# Altium PCB FAFMACMU_ControlPanel-V3-031115.PcbDoc (part 1 of 3)
Units mm, origin at the board's own origin, x right, y up, seen from the top; angles counter-clockwise.
Board outline 264 x 75.64 mm, 2 copper layers (Top Layer, Bottom Layer), stack 1.66 mm thick; 185 components, 162 nets, 766 pads, 792 vias.
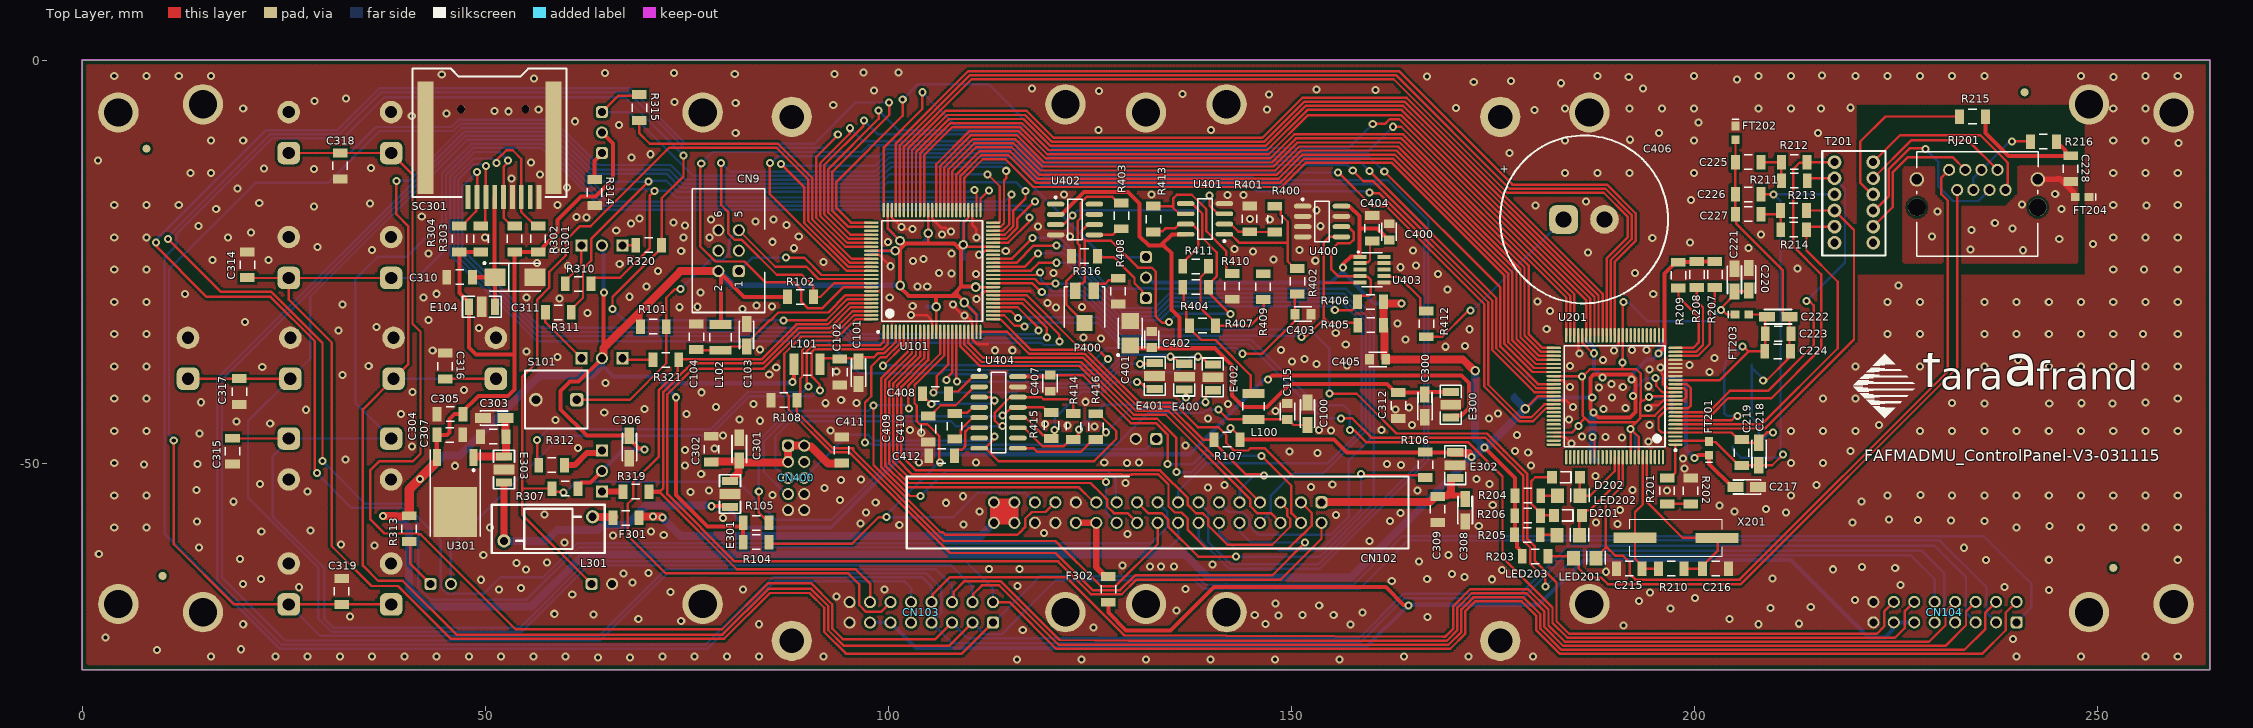
[diagram p0: Top Layer view]
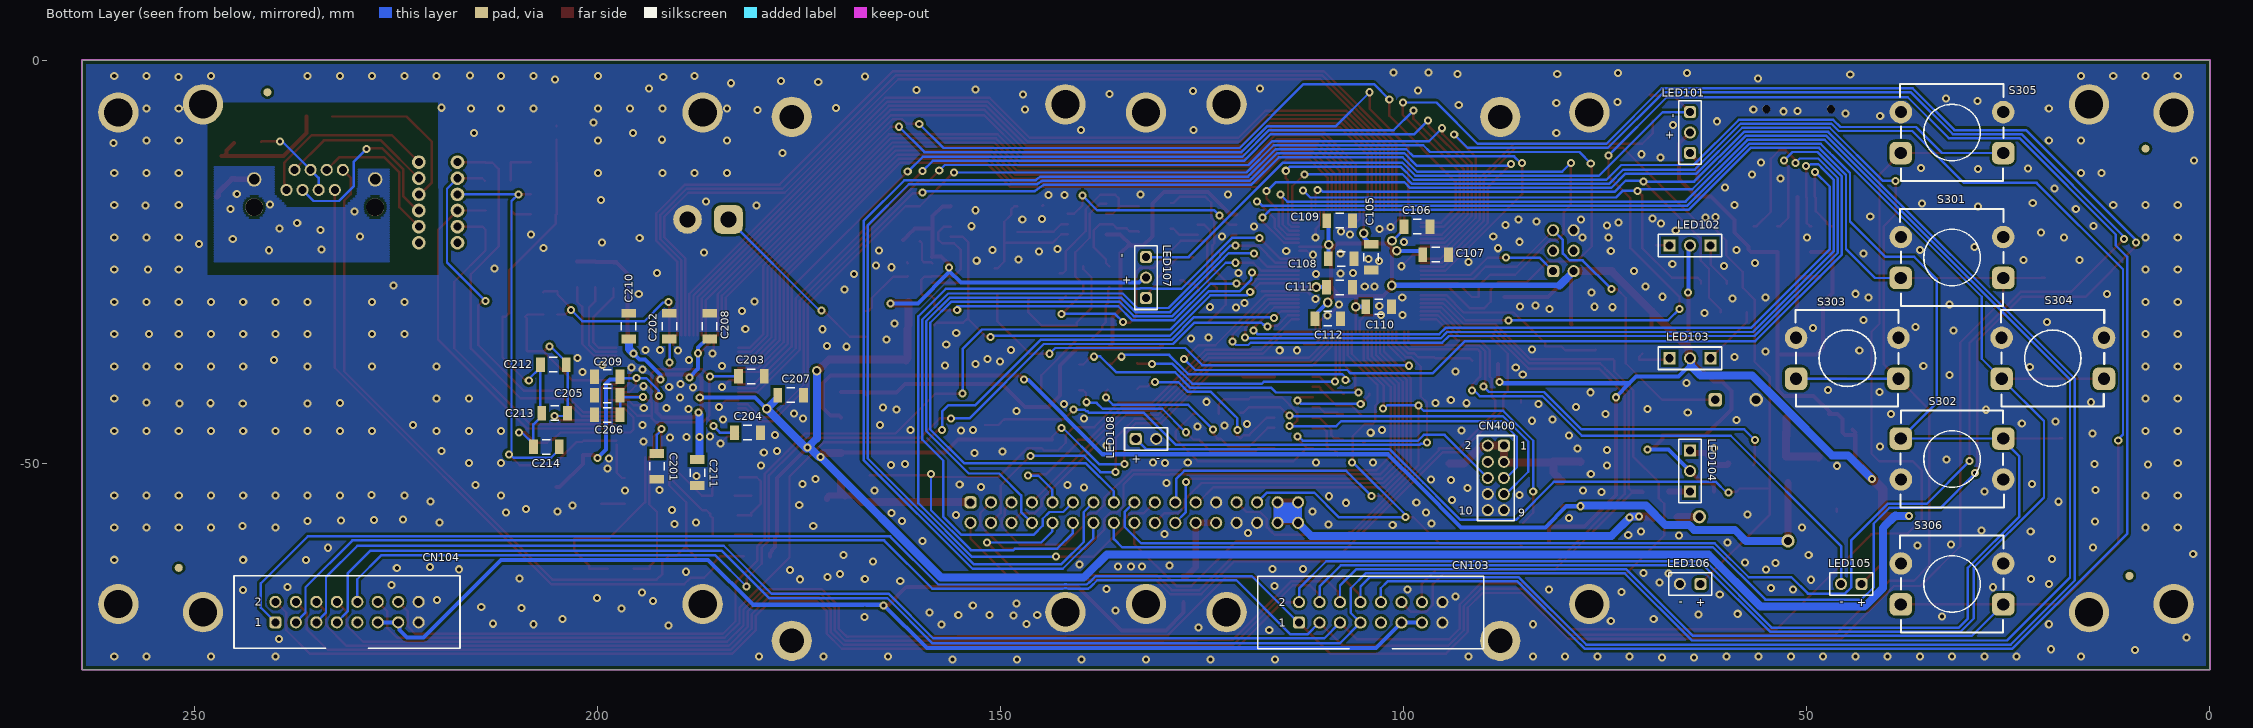
[diagram p1: Bottom Layer view, seen from below]

## Layer stack, top to bottom
Top Solder: solder mask 0.0102, Solder Resist, Dk 3.5
Top Layer: signal copper 0.03
Dielectric1: core 1.6, FR-4, Dk 4.8
Bottom Layer: signal copper 0.03
Bottom Solder: solder mask 0.0102, Solder Resist, Dk 3.5

## Board outline
0,-75.64 0,0 264,0 264,-75.64

## Design rules (kind name [scope] priority, off if disabled: settings)
Clearance Clearance_KeepOut [(OnLayer('Keep-Out Layer'))] p1: gap=0.4 ignorepadtopadclearanceinfootprint=FALSE except(0: Arc-Hole Track-Hole SMDPad-Hole THPad-Hole Via-Hole Fill-Hole Poly-Hole Region-Hole Text-Hole)
Clearance Clearance_100T1_N [(HasFootprint('100T1_N'))] p2: gap=0.2 ignorepadtopadclearanceinfootprint=FALSE except(0: Arc-Hole Track-Hole SMDPad-Hole THPad-Hole Via-Hole Fill-Hole Poly-Hole Region-Hole Text-Hole)
Clearance Clearance_Components [(InComponentClass('All Components'))] p3: gap=0.3 ignorepadtopadclearanceinfootprint=FALSE except(0: Arc-Hole Track-Hole SMDPad-Hole THPad-Hole Via-Hole Fill-Hole Poly-Hole Region-Hole Text-Hole)
Clearance Clearance_Poly [(InPolygon)] p4: gap=0.3 ignorepadtopadclearanceinfootprint=FALSE except(0: Arc-Hole Track-Hole SMDPad-Hole THPad-Hole Via-Hole Fill-Hole Poly-Hole Region-Hole Text-Hole)
Clearance [All] p5: gap=0.3 ignorepadtopadclearanceinfootprint=FALSE except(0: Arc-Hole Track-Hole SMDPad-Hole THPad-Hole Via-Hole Fill-Hole Poly-Hole Region-Hole Text-Hole; 0.2: Arc-Arc Arc-Track Track-Track)
FabricationTestPointUsage TestPointUsage [All] p1: valid=0 allowmultiple=FALSE
FabricationTestpoint Testpoint [(IsPad And (OnTopLayer Or OnBottomLayer))] p1: side=3 testpointundercomponent=TRUE minsize=1.016 maxsize=2.54 preferedsize=1.524 minholesize=0 maxholesize=1.016 preferedholesize=0.813 testpointgrid=0.025 allowsidetop=TRUE allowsidebottom=TRUE usegrid=TRUE gridtolerance=0
HoleSize [All] p1: absolutevalues=TRUE maxlimit=9 minlimit=0.5 maxpercent=80.000 minpercent=20.000
HoleToHoleClearance [All] p1: gap=0.3 allowstackedmicrovias=TRUE
MinimumAnnularRing [All] p1: minimumring=0.25
MinimumSolderMaskSliver [All] p1: minsoldermaskwidth=0.2
PlaneConnect [All] p1: planeconnectstyle=Direct reliefexpansion=0.508 reliefentries=4 reliefconductorwidth=0.254 reliefairgap=0.254
PolygonConnect [All] p1: connectstyle=Direct reliefconductorwidth=0.254 reliefentries=4 polygonreliefangle="90 Angle" airgapwidth=0.254
RoutingVias [All] p1: holewidth=0.5 width=1 viastyle="Through Hole" minholewidth=0.5 minwidth=1 maxholewidth=5 maxwidth=10
SilkToSilkClearance [All] p1: silktosilkclearance=0.2
SilkToSolderMaskClearance SilkscreenOverComponentPads [IsPad] p1: minsilkscreentomaskgap=0.1 clearancetoexposedcopper=TRUE
SolderMaskExpansion [All] p1: expansion=0.1 istentingtop=FALSE
UnConnectedPin [All] p1:
ViasUnderSMD [All] p1: allowed=FALSE
Width [All] p1: maxlimit=5 minlimit=0.3 preferedwidth=0.5
22 further rules are at their usual default settings.

## Classes and differential pairs
component class "Peripherals 2": C400 C401 C402 C403 C404 C405 C406 C407 C408 C409 C410 C411 C412 CN400 E400 E401 E402 P400 R400 R401 R402 R403 R404 R405 R406 R407 R408 R409 R410 R411 R412 R413 R414 R415 R416 U400 U401 U402 U403 U404
component class "Ethernet & LCD": C201 C202 C203 C204 C205 C206 C207 C208 C209 C210 C211 C212 C213 C214 C215 C216 C217 C218 C219 C220 C221 C222 C223 C224 C225 C226 C227 C228 D201 D202 FT201 FT202 FT203 FT204 LED201 LED202 LED203 R201 R202 R203 R204 R205 R206 R207 R208 R209 R210 R211 R212 R213 R214 R215 R216 RJ201 T201 U201 X201
component class Peripherals: C300 C301 C302 C303 C304 C305 C306 C307 C308 C309 C310 C311 C312 C314 C315 C316 C317 C318 C319 CN102 CN103 CN104 E104 E300 E301 E302 E303 F301 F302 L301 LED101 LED102 LED103 LED104 LED105 LED106 LED107 LED108 R301 R302 R303 R304 R307 R310 R311 R312 R313 R314 R315 R316 R319 R320 R321 S301 S302 S303 S304 S305 S306 SC301 U301
component class Xmega: C100 C101 C102 C103 C104 C105 C106 C107 C108 C109 C110 C111 C112 C115 CN9 L100 L101 L102 R101 R102 R104 R105 R106 R107 R108 S101 U101

## Components (designator, comment, footprint, x,y, rotation, side; value= is the part's Value field where it differs from the comment)
C100 "4.7uF Tant10V" CAP-TAN 152.04,-42.48 r0 top locked value=100pF
C101 "4.7uF Tant10V" A 96.34,-38.78 r270 top value=100pF
C102 "100nF" 1206_FA#1 94.02,-38.71 r270 top value=100pF
C103 "4.7uF Tant10V" A 82.46,-34.14 r90 top value=100pF
C104 "100nF" 1206_FA#1 76.21,-34.33 r270 top value=100pF
C105 "100nF" 1206_FA#1 104.06,-24.46 r270 bottom locked value=100pF
C106 "100nF" 1206_FA#1 98.37,-20.67 r180 bottom value=100pF
C107 "100nF" 1206_FA#1 96.06,-24.13 r180 bottom locked value=100pF
C108 "100nF" 1206_FA#1 107.79,-24.67 r0 bottom locked value=100pF
C109 "100nF" 1206_FA#1 107.97,-19.92 r0 bottom locked value=100pF
C110 "100nF" 1206_FA#1 103.14,-30.61 r0 bottom locked value=100pF
C111 "100nF" 1206_FA#1 107.99,-28.21 r0 bottom locked value=100pF
C112 "100nF" 1206_FA#1 109.45,-32.09 r0 bottom locked value=100pF
C115 "100nF" 0805_FA 149.54,-44.61 r0 top locked
C201 "100nF" 1206_FA#1 192.69,-50.41 r270 bottom locked value=100pF
C202 "100nF" 1206_FA#1 191.14,-33.01 r90 bottom locked value=100pF
C203 "100nF" 1206_FA#1 180.96,-39.24 r180 bottom locked value=100pF
C204 "100nF" 1206_FA#1 181.44,-46.22 r180 bottom locked value=100pF
C205 "100nF" 1206_FA#1 198.84,-41.61 r0 bottom locked value=100pF
C206 "100nF" 1206_FA#1 198.84,-44.01 r0 bottom locked value=100pF
C207 "100nF" 1206_FA#1 176.09,-41.57 r0 bottom locked value=100pF
C208 "100nF" 1206_FA#1 186.15,-33.01 r270 bottom locked value=100pF
C209 "100nF" 1206_FA#1 198.84,-39.3 r180 bottom locked value=100pF
C210 "100nF" 1206_FA#1 196.2,-33.01 r270 bottom locked value=100pF
C211 "100nF" 1206_FA#1 187.65,-51.18 r90 bottom locked value=100pF
C212 "100nF" 1206_FA#1 205.529,-37.793 r180 bottom locked value=100pF
C213 "100nF" 1206_FA#1 205.37,-43.82 r180 bottom locked value=100pF
C214 "100nF" 1206_FA#1 206.4,-47.99 r180 bottom locked value=100pF
C215 "15pF" 1206_FA#1 191.95,-63.11 r180 top locked value=100pF
C216 "15pF" 1206_FA#1 202.66,-63.11 r0 top locked value=100pF
C217 "10uF Tant10V" A 206.54,-52.98 r0 top locked value=100pF
C218 "10uF Tant10V" A 208.03,-48.88 r90 top locked value=100pF
C219 "100nF" 1206_FA#1 205.9,-48.7 r270 top locked value=100pF
C220 "10uF Tant10V" A 206.76,-27.21 r90 top locked value=100pF
C221 "3.3uF Tant10V" A 205.01,-27.3 r90 top locked value=100pF
C222 "10uF Tant10V" A 210.43,-31.85 r0 top locked value=100pF
C223 "100nF" 1206_FA#1 210.42,-33.96 r180 top locked value=100pF
C224 "100nF" 1206_FA#1 210.37,-36.15 r180 top locked value=100pF
C225 "100nF" 1206_FA#1 206.72,-12.67 r0 top locked value=100pF
C226 "100nF" 1206_FA#1 206.72,-16.66 r0 top locked value=100pF
C227 "100nF" 1206_FA#1 206.72,-19.11 r0 top locked value=100pF
C228 "1nF 2kV" 1206_FA#1 246.71,-13.48 r90 top value=100pF
C300 "10uF Tant10V" CAP-TAN 166.6,-41.52 r0 top locked value=100pF
C301 "10uF Tant10V" A 81.54,-48.27 r90 top locked value=100pF
C302 "100nF" 1206_FA#1 78.07,-48.28 r270 top locked value=100pF
C303 "10uF Tant10V" A 51.13,-44.42 r180 top locked value=100pF
C304 "100nF" 1206_FA#1 51.02,-46.73 r0 top locked value=100pF
C305 "100nF" 1206_FA#1 45.66,-43.93 r0 top locked value=100pF
C306 "10uF Tant10V" A 67.91,-48.01 r270 top locked value=100pF
C307 "10nF" 1206_FA#1 45.64,-46.51 r180 top locked value=100pF
C308 "10uF Tant10V" A 171.6,-55.84 r270 top locked value=100pF
C309 "100nF" 1206_FA#1 168.19,-55.76 r90 top locked value=100pF
C310 "100nF" 1206_FA#1 46.85,-26.95 r180 top locked value=100pF
C311 "100uF Tant10V" C 53.72,-26.95 r0 top locked value=100pF
C312 "100nF" 1206_FA#2 163.3,-44.46 r0 top locked value=100pF
C314 "100nF" 1206_FA#1 20.51,-25.4 r270 top locked value=100pF
C315 "100nF" 1206_FA#1 18.67,-48.53 r90 top locked value=100pF
C316 "100nF" 1206_FA#1 45.06,-37.97 r270 top locked value=100pF
C317 "100nF" 1206_FA#1 19.52,-41.13 r90 top locked value=100pF
C318 "100nF" 1206_FA#1 32.02,-13.14 r90 top locked value=100pF
C319 "100nF" 1206_FA#1 32.21,-65.93 r270 top locked value=100pF
C400 "100nF" 0805_FA 162.16,-22.31 r0 top value=100pF
C401 "10uF Tant25V" B 130.04,-35.4 r270 top value=100pF
C402 "100nF" 0805_FA 132.71,-33.67 r180 top value=100pF
C403 "100nF" 0805_FA 152.47,-31.52 r90 top locked value=100pF
C404 "47pF" 1206_FA#2 160.05,-22.47 r0 top value=100pF
C405 "100nF" 0805_FA 161.74,-37.14 r90 top locked value=100pF
C406 "1F EL5.5V" CAP1F 186.34,-19.78 r0 top locked value=100pF
C407 "100nF" 0805_FA 120.11,-39.09 r180 top locked
C408 "100nF" 1206_FA#2 104.28,-41.42 r270 top locked
C409 "100nF" 1206_FA#2 105,-44.18 r180 top locked
C410 "100nF" 1206_FA#2 108.25,-47.04 r0 top locked
C411 "100nF" 1206_FA#2 94.24,-49.99 r0 top
C412 "100nF" 1206_FA#2 105.04,-49.12 r270 top locked
CN9 "IDC Male(2.54)" HDR2X3_M 81.48,-26.2 r90 top locked
CN102 "IDC Male Lock(2.54)" "IDC_LOCK 2X17" 153.77,-54.87 r180 top locked
CN103 "PinHeader Female(2.54)" HDR2*8_M 113.01,-69.8 r0 top locked
CN104 "PinHeader Female(2.54)" HDR2*8_M 240.01,-69.76 r0 top locked
CN400 "PinHeader Female(2.54)" HDR2*5 87.6,-47.85 r0 top locked
D201 "LL4148" MiniMelf 184.36,-56.49 r0 top locked
D202 "LL4148" MiniMelf 184.11,-51.76 r0 top locked
E104 "NFM31PC276B0J3" EMI1206 48.01,-30.61 r270 top locked
E300 "NFM31PC276B0J3" EMI-1206 169.81,-44.37 r0 top locked
E301 "NFM31PC276B0J3" EMI1206 80.39,-55.45 r0 top locked
E302 "NFM31PC276B0J3" EMI1206 170.36,-48.66 r180 top
E303 "NFM31PC276B0J3" EMI1206 52.35,-52.4 r0 top locked
E400 "NFM3DCC102R1H3" EMI-1206 136.75,-37.68 r180 top locked
E401 "NFM3DCC102R1H3" EMI-1206 133.08,-37.61 r180 top locked
E402 "NFM3DCC102R1H3" EMI-1206 140.29,-37.77 r180 top locked
F301 "SF-1206S250-2" 1206_FA#1 67.48,-56.79 r0 top locked
F302 "SF-1206S250-2" 1206_FA#1 127.33,-65.67 r270 top locked
FT201 "MPZ1608Y101BTA00" 0603 201.87,-48.18 r90 top locked value=1K
FT202 "MPZ1608Y101BTA00" 0603 205.13,-9.05 r270 top locked value=1K
FT203 "MPZ1608Y101BTA00" 0603 205.92,-31.57 r0 top locked value=1K
FT204 "MPZ1608Y101BTA00" 0603 248.14,-16.97 r180 top locked value=1K
L100 "27nH" 1210_FA#1 145.35,-41.38 r270 top locked
L101 "27nH" 1210_FA#2 89.95,-37.74 r0 top locked
L102 "27nH" 1210_FA#2 79.21,-34.4 r270 top
L301 "VK200" VK200 57.85,-58.16 r180 top locked
LED101 "RG LED" LED3CA#1 64.5,-9 r90 bottom locked
LED102 "RG LED" LED3CA#2 64.5,-23 r0 bottom locked
LED103 "RG LED" LED3CA#2 64.5,-37 r0 bottom locked
LED104 "RG LED" LED3CA#2 64.5,-51 r270 bottom locked
LED105 "LED Green" "LED RADIALl 0.1" 44.5,-65 r270 bottom locked
LED106 "LED Red" "LED RADIALl 0.1" 64.5,-65 r270 bottom locked
LED107 "RG LED" LED3CA#1 132,-27 r90 bottom locked
LED108 "LED Red" "LED RADIALl 0.1" 132,-47 r90 bottom locked
LED201 "LED Green" LEDSMD_1206 185.03,-61.8 r0 top locked
LED202 "LED Red" LEDSMD_1206 183.049,-54.056 r0 top locked
LED203 "LED Red" LEDSMD_1206 182.969,-58.943 r0 top locked
P400 "N.F. 10K Multi Turn" 3224W 124.38,-30.62 r270 top locked
R101 "10K 1%" 1206_FA#1 70.88,-33.07 r180 top locked value=1K
R102 "3.3K 1%" 1206_FA#1 89.13,-29.4 r0 top locked value=1K
R104 "NF 3.3K 1%" 1206_FA#1 83.63,-59.8 r180 top locked value=1K
R105 "NF 3.3K 1%" 1206_FA#1 83.63,-57.42 r180 top locked value=1K
R106 "NF 3.3K 1%" 1206_FA#1 166.67,-50.21 r90 top value=1K
R107 "NF 3.3K 1%" 1206_FA#1 142.05,-47.09 r0 top locked value=1K
R108 "10K 1%" 1206_FA#1 87.08,-42.2 r0 top locked value=1K
R201 "12K 1%" 1206_FA#1 196.65,-53.46 r270 top locked value=1K
R202 "300R 1%" 1206_FA#1 199.58,-53.46 r90 top locked value=1K
R203 "680R 1%" 1206_FA#1 180.27,-61.57 r180 top locked value=1K
R204 "3.3K 1%" 1206_FA#1 179.38,-54.056 r180 top locked value=1K
R205 "3.3K 1%" 1206_FA#1 179.31,-58.91 r180 top locked value=1K
R206 "4.7K 1%" 1206_FA#1 179.35,-56.53 r180 top locked value=1K
R207 "Not Fit" 1206_FA#1 202.58,-26.61 r90 top locked value=1K
R208 "Not Fit" 1206_FA#1 200.35,-26.61 r90 top locked value=1K
R209 "Not Fit" 1206_FA#1 198.06,-26.69 r90 top locked value=1K
R210 "1M 5%" 1206_FA#1 197.16,-63.11 r0 top locked value=1K
R211 "49.9R 1%" 1206_FA#1 212.44,-14.97 r180 top locked value=1K
R212 "49.9R 1%" 1206_FA#1 212.42,-12.67 r180 top locked value=1K
R213 "49.9R 1%" 1206_FA#1 212.33,-18.67 r0 top locked value=1K
R214 "49.9R 1%" 1206_FA#1 212.34,-21.05 r0 top locked value=1K
R215 "75R 1%" 1206_FA#1 234.54,-7.01 r180 top value=1K
R216 "75R 1%" 1206_FA#1 243.34,-10.13 r180 top value=1K
R301 "3.3K 1%" 1206_FA#1 56.6,-22.2 r90 top locked value=1K
R302 "10K 1%" 1206_FA#1 53.68,-22.2 r90 top locked value=1K
R303 "3.3K 1%" 1206_FA#1 49.48,-22.2 r90 top locked value=1K
R304 "3.3K 1%" 1206_FA#1 46.81,-22.2 r90 top locked value=1K
R307 "3.3K 1%" 1206_FA#1 59.93,-53.16 r0 top locked value=1K
R310 "1K 1%" 1206_FA#1 61.55,-27.76 r180 top locked value=1K
R311 "1K 1%" 1206_FA#1 59.09,-31.31 r180 top locked value=1K
R312 "3.3K 1%" 1206_FA#1 58.27,-50.26 r0 top locked value=1K
R313 "1K 1%" 1206_FA#1 40.59,-58.14 r90 top locked value=1K
R314 "1K 1%" 1206_FA#1 63.6,-16.44 r270 top locked value=1K
R315 "1K 1%" 1206_FA#1 69.15,-5.9 r90 top locked value=1K
R316 "1K 1%" 1206_FA#1 124.37,-24.32 r180 top locked value=1K
R319 "3.3K 1%" 1206_FA#1 68.72,-53.55 r180 top locked value=1K
R320 "3.3K 1%" 1206_FA#1 70.3,-22.98 r180 top locked value=1K
R321 "3.3K 1%" 1206_FA#1 72.43,-37.19 r180 top locked value=1K
R400 "10K 1%" 1206_FA#2 147.98,-18.14 r180 top locked value=1K
R401 "4.7K 1%" 1206_FA#2 144.87,-21.3 r0 top locked value=1K
R402 "1K 1%" 1206_FA#2 150.78,-29.05 r0 top locked value=1K
R403 "N.F. 470K 1%" 1206_FA#2 128.94,-17.74 r180 top locked value=1K
R404 "N.F. 1K 1%" 1206_FA#2 139.76,-28.19 r90 top locked value=1K
R405 "4.7K 1%" 1206_FA#2 158.265,-32.89 r270 top value=1K
R406 "4.7K 1%" 1206_FA#2 158.25,-30.01 r270 top value=1K
R407 "N.F. 1K 1%" 1206_FA#2 140.61,-32.95 r90 top value=1K
R408 "N.F. 1K 1%" 1206_FA#2 128.53,-27.07 r180 top value=1K
R409 "N.F. 1K 1%" 1206_FA#2 146.54,-26.51 r180 top locked value=1K
R410 "4.7K 1%" 1206_FA#2 142.69,-26.48 r180 top locked value=1K
R411 "N.F. 1K 1%" 1206_FA#2 139.76,-25.6 r90 top locked value=1K
R412 "0R 1%" 1206_FA#2 166.79,-31.14 r180 top locked value=1K
R413 "4.7K 1%" 1206_FA#2 132.9,-21.33 r0 top locked value=1K
R414 "Not Fit" 1206_FA#2 122.98,-47.06 r0 top locked value=1K
R415 "Not Fit" 1206_FA#2 120.27,-46.94 r0 top locked value=1K
R416 "Not Fit" 1206_FA#2 125.79,-43.88 r180 top locked value=1K
RJ201 "" RJ45b 238.64,-16.12 r180 top locked
S101 "Push Button" SPS2_M(2Pin) 58.84,-42.14 r270 top locked
S301 "Push Button 12x12x22" "Push Bottom  12*12*22" 32,-24.5 r0 bottom locked value="Push Button"
S302 "Push Button 12x12x22" "Push Bottom  12*12*22" 32,-49.5 r180 bottom locked value="Push Button"
S303 "Push Button 12x12x22" "Push Bottom  12*12*22" 45,-37 r0 bottom locked value="Push Button"
S304 "Push Button 12x12x22" "Push Bottom  12*12*22" 19.5,-37 r0 bottom locked value="Push Button"
S305 "Push Button 12x12x22" "Push Bottom  12*12*22" 32,-9 r0 bottom locked value="Push Button"
S306 "Push Button 12x12x22" "Push Bottom  12*12*22" 32,-65 r0 bottom locked value="Push Button"
SC301 "MicroSD Socket" "Micro SD Sock." 49,-16 r0 top locked
T201 "12PS6121UX" 12PS6121UX-DATA 217.42,-12.67 r270 top locked
U101 "ATXMEGA128A1" 100T1_N 105.47,-26.17 r90 top locked
U201 "W5300" 100T1_N 190.14,-41.71 r180 top locked
U301 "LF33CDT" TO-252 46.3,-52.67 r180 top locked
U400 "AT24C256C-SSHL-B" SO8_N 151.44,-18.13 r90 top locked
U401 "LM2904" SO8_N 141.72,-21.62 r270 top locked
U402 "REF03GS" SO8_N 120.79,-17.88 r90 top locked
U403 "AB-RTCMC-32.768KHZ-IBO5-S3" VDFN-10 158.54,-24.41 r90 top locked
U404 "MAX3232CUE+" SO16_N 111.31,-39.28 r0 top locked
X201 "25MHz" "CRYSTAL 25.000MHZ" 192.67,-59.26 r0 top locked

## Footprints (in the part's own frame and the unit in brackets; to place one, negate y for a bottom-side part, rotate by r counter-clockwise, add the part's x,y. Pads: shape width x height; smd on the part's side, far side on the other; paste and mask are expansions set on the pad)
12PS6121UX-DATA [mm]
  round 1.7 hole 1: 1(0,0) 2(2,0) 3(4,0) 4(6,0) 5(8,0) 6(10,0) 7(10,4.8) 8(8,4.8) 9(6,4.8) 10(4,4.8) 11(2,4.8) 12(0,4.8)
  silkscreen extent -1.4,-1.52 11.56,6.35
100T1_N [mm] "100-Pin Thin Quad Flat Pack 0.5 mm Pitch, IPC Medium Density"
  oval 1.8x0.3 smd: 1(-7.55,6) 2(-7.55,5.5) 3(-7.55,5) 4(-7.55,4.5) 5(-7.55,4) 6(-7.55,3.5) 7(-7.55,3) 8(-7.55,2.5) 9(-7.55,2) 10(-7.55,1.5) 11(-7.55,1) 12(-7.55,0.5) 13(-7.55,0) 14(-7.55,-0.5) 15(-7.55,-1) 16(-7.55,-1.5) 17(-7.55,-2) 18(-7.55,-2.5) 19(-7.55,-3) 20(-7.55,-3.5) 21(-7.55,-4) 22(-7.55,-4.5) 23(-7.55,-5) 24(-7.55,-5.5) 25(-7.55,-6) 51(7.55,-6) 52(7.55,-5.5) 53(7.55,-5) 54(7.55,-4.5) 55(7.55,-4) 56(7.55,-3.5) 57(7.55,-3) 58(7.55,-2.5) 59(7.55,-2) 60(7.55,-1.5) 61(7.55,-1) 62(7.55,-0.5) 63(7.55,0) 64(7.55,0.5) 65(7.55,1) 66(7.55,1.5) 67(7.55,2) 68(7.55,2.5) 69(7.55,3) 70(7.55,3.5) 71(7.55,4) 72(7.55,4.5) 73(7.55,5) 74(7.55,5.5) 75(7.55,6)
  oval 0.3x1.8 smd: 26(-6,-7.55) 27(-5.5,-7.55) 28(-5,-7.55) 29(-4.5,-7.55) 30(-4,-7.55) 31(-3.5,-7.55) 32(-3,-7.55) 33(-2.5,-7.55) 34(-2,-7.55) 35(-1.5,-7.55) 36(-1,-7.55) 37(-0.5,-7.55) 38(0,-7.55) 39(0.5,-7.55) 40(1,-7.55) 41(1.5,-7.55) 42(2,-7.55) 43(2.5,-7.55) 44(3,-7.55) 45(3.5,-7.55) 46(4,-7.55) 47(4.5,-7.55) 48(5,-7.55) 49(5.5,-7.55) 50(6,-7.55) 76(6,7.55) 77(5.5,7.55) 78(5,7.55) 79(4.5,7.55) 80(4,7.55) 81(3.5,7.55) 82(3,7.55) 83(2.5,7.55) 84(2,7.55) 85(1.5,7.55) 86(1,7.55) 87(0.5,7.55) 88(0,7.55) 89(-0.5,7.55) 90(-1,7.55) 91(-1.5,7.55) 92(-2,7.55) 93(-2.5,7.55) 94(-3,7.55) 95(-3.5,7.55) 96(-4,7.55) 97(-4.5,7.55) 98(-5,7.55) 99(-5.5,7.55) 100(-6,7.55)
  silkscreen extent -7.67,-6.25 6.25,6.82, body extent -7,-7 7,7, height 1.05
0603 [mm] "Chip Capacitor; Body 1.6 x 0.8 mm (LxW typ)"
  rect 1.1x1 smd: 1(-0.85,0) 2(0.85,0)
  silkscreen extent -1.7,-0.4 -1.7,0.4
0805_FA [mm]
  rect 1.3x1.1 smd: 1(0,0) 2(0,2)
  silkscreen extent -0.89,-0.1 0.89,2.1
1206_FA#1 [mm] "1206 Capacitor/Resistor"
  rect 1.1x1.8 smd: 1(-1.6,0) 2(1.6,0)
  silkscreen extent -0.5,-0.9 0.5,0.9
1206_FA#2 [mm]
  rect 1.8x1.1 smd: 1(0,0) 2(0,3.2)
  silkscreen extent -0.9,1.1 0.9,2.1
1210_FA#1 [mm]
  rect 1.1x2.7 smd: 1(0,0) 2(3.2,0)
  silkscreen extent 1.1,-1.35 2.1,1.35
1210_FA#2 [mm]
  rect 1.1x2.7 smd: 1(-1.6,0) 2(1.6,0)
  silkscreen extent -0.5,-1.35 0.5,1.35
3224W [mm]
  rect 2x1.3 smd: CCW(-2,-1.15) CW(-2,1.15)
  rect 2x2 smd: W(2,0)
  silkscreen extent -2.5,-2.5 2.5,2.5
A [mm] "Capacitor, SM Tantalum; Body 3.2 x 1.6 mm (LxW typ)"
  rect 2x1.2 smd: 1(-1.4,0) 2(1.4,0)
  silkscreen extent -1.7,-0.9 1.7,0.9
B [mm]
  rect 2x2.2 smd: 1(0,0) 2(-3,0)
  silkscreen extent -3.35,-1.62 1.32,1.5
C [mm] "Capacitor, SM Tantalum; Body 6.0 x 3.2 mm (LxW typ)"
  rect 2.6x2.2 smd: 1(-2.5,0) 2(2.5,0)
  silkscreen extent -3.92,-1.75 3.15,1.87
CAP1F [mil]
  rrect50% 140x140 hole 80: 1(-100,0)
  round 140 hole 80: 2(100,0)
  silkscreen extent -410,-410 410,410
CAP-TAN [mm]
  rect 1.2x2 smd: 1(0,0) 2(0,-2.8)
  silkscreen extent -0.9,-3.1 0.9,0.3
"CRYSTAL 25.000MHZ" [mil]
  rect 210x50 smd: 1(0,0) 2(400,-1)
  silkscreen extent -25,-90 425,90
EMI1206 [mm]
  rect 2x1 smd: 1(0,0) 3(0,3.2)
  rect 2.6x1.2 smd: 2(0,1.6)
  silkscreen extent -1.3,-0.8 1.3,4
EMI-1206 [mm]
  rect 2x1 smd: 1(0,0) 3(0,3.2)
  rect 2.6x1.2 smd: 2(0,1.6)
  silkscreen extent -1.3,-0.8 1.3,4
HDR2*5 [mm]
  rrect50% 1.5x1.5 hole 1: 1(0,0)
  round 1.5 hole 1: 2(2,0) 3(0,-2) 4(2,-2) 5(0,-4) 6(2,-4) 7(0,-6) 8(2,-6) 9(0,-8) 10(2,-8)
HDR2*8_M [mm]
  rrect50% 1.5x1.5 hole 1: 1(0,0)
  round 1.5 hole 1: 2(0,2.54) 3(-2.54,0) 4(-2.54,2.54) 5(-5.08,0) 6(-5.08,2.54) 7(-7.62,0) 8(-7.62,2.54) 9(-10.16,0) 10(-10.16,2.54) 11(-12.7,0) 12(-12.7,2.54) 13(-15.24,0) 14(-15.24,2.54) 15(-17.78,0) 16(-17.78,2.54)
HDR2X3_M [mm]
  rrect50% 1.5x1.5 hole 1: 1(0,0)
  round 1.5 hole 1: 2(0,2.54) 3(2.54,0) 4(2.54,2.54) 5(5.08,0) 6(5.08,2.54)
  silkscreen extent -5.13,-3.23 10.21,5.77
"IDC_LOCK 2X17" [mm]
  rrect50% 1.5x1.5 hole 1: 1(0,0)
  round 1.5 hole 1: 2(0,2.54) 3(2.54,0) 4(2.54,2.54) 5(5.08,0) 6(5.08,2.54) 7(7.62,0) 8(7.62,2.54) 9(10.16,0) 10(10.16,2.54) 11(12.7,0) 12(12.7,2.54) 13(15.24,0) 14(15.24,2.54) 15(17.78,0) 16(17.78,2.54) 17(20.32,0) 18(20.32,2.54) 19(22.86,0) 20(22.86,2.54) 21(25.4,0) 22(25.4,2.54) 23(27.94,0) 24(27.94,2.54) 25(30.48,0) 26(30.48,2.54) 27(33.02,0) 28(33.02,2.54) 29(35.56,0) 30(35.56,2.54) 31(38.1,0) 32(38.1,2.54) 33(40.64,0) 34(40.64,2.54)
  silkscreen extent -10.81,-3.18 51.45,5.72
LED3CA#1 [mm] "Common Anod"
  rrect50% 1.5x1.5 hole 1: 1(-2.54,0) 3(2.54,0)
  round 1.5 hole 1: 2(0,0)
  silkscreen extent -3.95,-1.4 3.95,1.4
LED3CA#2 [mm] "Common Anod"
  rect 1.5x1.5 hole 1: 1(-2.54,0) 3(2.54,0)
  round 1.5 hole 1: 2(0,0)
  silkscreen extent -3.95,-1.4 3.95,1.4
"LED RADIALl 0.1" [mm]
  rrect50% 1.5x1.5 hole 1: A(0,1.27)
  round 1.5 hole 1: K(0,-1.27)
  silkscreen extent -1.4,-2.67 1.4,2.67
LEDSMD_1206 [mm]
  rect 1.6x1.8 smd: 1(0,0) 2(2.8,0)
  silkscreen extent 1.65,-0.76 3.94,0.84
"Micro SD Sock." [mm]
  round 1 hole 1 mask+0.1: 0(-1.959,9.895)
  round 1 hole 1 paste+0.1: 0(6.041,9.895)
  rect 0.6x3 smd: 1(0,-1) 2(1.1,-1) 3(4.4,-1) 4(2.2,-1) 5(3.3,-1) 6(7.7,-1) 7(5.5,-1) ""(-1.1,-1) ""(6.6,-1)
  rect 2x14 smd: 3(-6.388,6.364) 6(9.515,6.364)
  silkscreen extent -8,-1 11.12,14.93
MiniMelf [mm] "Metal Electrode Face (MELF) Diode; Body 3.5 x 1.5 mm (LxDia)"
  rect 1.25x1.6 smd: 1(-1.725,0) 2(1.725,0)
  silkscreen extent -0.73,-0.7 0.61,0.7
"Push Bottom  12*12*22" [mil] "4Pin"
  rrect50% 110x110 hole 60: 1(-250,100) 1(250,100)
  round 110 hole 59.06: 2(-250,-100) 2(250,-100)
  silkscreen extent -251,-236 253,237
RJ45b [mm] "RJ45 8P8C Female PCB Mount"
  round 2.2 hole 2.2: 0(-4,2.15) 0(11,2.15)
  round 1.5 hole 1: 1(0,0) 2(1,-2.5) 3(2,0) 4(3,-2.5) 5(4,0) 6(5,-2.5) 7(6,0) 8(7,-2.5)
  round 1.8 hole 1.3: 9(-4,-1.3) 10(11,-1.3)
  silkscreen extent -4.04,-4.76 11.02,8.24
SO8_N [mm]
  oval 0.6x2.2 smd: 1(0,0) 2(-1.27,0) 3(-2.54,0) 4(-3.81,0) 5(-3.81,-4.8) 6(-2.54,-4.8) 7(-1.27,-4.8) 8(0,-4.8)
  silkscreen extent -4.41,-3.3 0.97,0.12, body extent -4.36,-4.35 0.55,-0.45, height 1.75
SO16_N [mm]
  oval 2.2x0.6 smd: 1(0,0) 2(0,-1.27) 3(0,-2.54) 4(0,-3.81) 5(0,-5.08) 6(0,-6.35) 7(0,-7.62) 8(0,-8.89) 9(4.8,-8.89) 10(4.8,-7.62) 11(4.8,-6.35) 12(4.8,-5.08) 13(4.8,-3.81) 14(4.8,-2.54) 15(4.8,-1.27) 16(4.8,0)
  silkscreen extent -0.12,-9.45 3.3,0.97, body extent 0.45,-9.4 4.35,0.51, height 1.75
SPS2_M(2Pin) [mm] "Push Bottom  mini size"
  rrect50% 1.7x1.7 hole 1.1: 1(0,2.54)
  round 1.7 hole 1.1: 2(0,-2.54)
  silkscreen extent -3.6,-3.86 3.6,3.89
TO-252 [mm] "D-PAK/TO-252-AA; 3 Leads (1 Cropped); Body 10.1 (inc. leads) x 6.6 mm (LxW max)"
  rect 1x2.1 smd: 1(-2.285,-3.375) 3(2.285,-3.375)
  rect 5.4x6.2 smd: 4(0,3.375)
  silkscreen extent -3.09,-4.32 3.09,6.38
VDFN-10 [mm]
  rect 0.5x1.6 smd: 1(0,0) 2(-0.8,0) 3(-1.6,0) 4(-2.4,0) 5(-3.2,0) 6(-3.2,-3) 7(-2.4,-3) 8(-1.6,-3) 9(-0.8,-3) 10(0,-3)
  silkscreen extent -3.7,-2.75 0.7,0.3
VK200 [mm]
  round 1.651 hole 1: 1(-5.5,-1.5) 2(5.5,1.5)
  silkscreen extent -7,-3 7,3

## Part data
C100 C101 C103 C217 C218 C220 C221 C222 C300 C301 C303 C306 C308 C311 C401: library part "Cap Pol3", "Polarized Capacitor (Surface Mount)", LatestRevisionDate=17-Jul-2002, LatestRevisionNote="Re-released for DXP Platform.", PackageReference=C0805, Published=8-Jun-2000, Publisher="Altium Limited"
C102 C104 C105 C106 C107 C108 C109 C110 C111 C112 C115 C201 C202 C203 C204 C205 C206 C207 C208 C209 C210 C211 C212 C213 C214 C215 C216 C219 C223 C224 C225 C226 C227 C302 C304 C305 C307 C309 C310 C312 C314 C315 C316 C317 C318 C319 C400 C402 C403 C404 C405: library part "Cap Semi", "Capacitor (Semiconductor SIM Model)", PackageReference=C1206, Published=8-Jun-2000, Publisher="Altium Limited"
  C102 C104 C105 C106 C107 C108 C109 C110 C111 C112 C201 C202 C203 C204 C205 C206 C207 C208 C209 C210 C211 C212 C213 C214 C215 C216 C219 C223 C224 C225 C226 C227 C302 C304 C305 C307 C309 C310 C312 C314 C315 C316 C317 C318 C319 C400 C402 C403 C404 C405: LatestRevisionDate=17-Jul-2002, LatestRevisionNote="Re-released for DXP Platform."
  C115: LatestRevisionDate=29-May-2009, LatestRevisionNote="IPC-7351 Footprint Added.", PackageDescription="Chip Capacitor"
C228 C407 C408 C409 C410 C411 C412: library part Cap, "Capacitor", LatestRevisionDate=17-Jul-2002, LatestRevisionNote="Re-released for DXP Platform.", PackageReference=RAD-0.3, Published=8-Jun-2000, Publisher="Altium Limited"
C406: library part "Cap Pol2", "Polarized Capacitor (Axial)", LatestRevisionDate=17-Jul-2002, LatestRevisionNote="Re-released for DXP Platform.", PackageReference=POLAR0.8, Published=8-Jun-2000, Publisher="Altium Limited"
CN9: library part "Header 3X2", "Header 3x2", LatestRevisionDate=17-Jul-2002, LatestRevisionNote="Re-released for DXP Platform.", Publisher="Altium Limited"
CN102: library part "Header 17X2", "Header, 17-Pin, Dual row", LatestRevisionDate=17-Jul-2002, LatestRevisionNote="Re-released for DXP Platform.", Publisher="Altium Limited"
CN103 CN104: library part "Header 8X2", "Header, 8-Pin, Dual row", LatestRevisionDate=17-Jul-2002, LatestRevisionNote="Re-released for DXP Platform.", Publisher="Altium Limited"
CN400: library part "Header 5X2", "Header, 5-Pin, Dual row", LatestRevisionDate=17-Jul-2002, LatestRevisionNote="Re-released for DXP Platform.", Publisher="Altium Limited"
D201 D202: library part DIODE, "Diode"
E104 E300 E301 E302 E303 E400 E401 E402 T201: library part Component_1
F301 F302: library part "Fuse 2", "Fuse", LatestRevisionDate=17-Jul-2002, LatestRevisionNote="Re-released for DXP Platform.", PackageReference=PIN-W2/E2.8, Published=8-Jun-2000, Publisher="Altium Limited"
FT201 FT202 FT203 FT204: library part Res2, "Resistor", LatestRevisionDate=17-Jul-2002, LatestRevisionNote="Re-released for DXP Platform.", PackageReference=AXIAL-0.4, Published=8-Jun-2000, Publisher="Altium Limited"
L100 L101 L102 L301: library part Inductor, "Inductor", Code_IEC=1005, Code_JEITA=0402, LatestRevisionDate=17-Jul-2002, LatestRevisionNote="Re-released for DXP Platform.", PackageReference=0402-A, Published=8-Jun-2000, Publisher="Altium Limited"
LED101 LED102 LED103 LED104 LED107: library part "Header 3H", "Header, 3-Pin, Right Angle", LatestRevisionDate=17-Jul-2002, LatestRevisionNote="Re-released for DXP Platform.", Publisher="Altium Limited"
LED105 LED106 LED108: library part LED
LED201 LED202 LED203: library part LED2, "Typical RED, GREEN, YELLOW, AMBER GaAs LED", PackageDocument=Feb-2002, LatestRevisionDate=17-Jul-2002, LatestRevisionNote="Re-released for DXP Platform.", PackageReference=3.2X1.6X1.1, Published=8-Jun-2000, Publisher="Altium Limited"
P400: library part "RPot SM", "Square Trimming Potentiometer", ComponentLink1Description="Manufacturer Link", ComponentLink1URL=http://bourns.com/2/search.html, DatasheetDocument=Oct-2003, PackageReference=POT4MM-2, Published=17-Dec-2003, Publisher="Altium Limited"
R101 R102 R104 R105 R106 R107 R108 R201 R202 R203 R204 R205 R206 R207 R208 R209 R210 R211 R212 R213 R214 R215 R216 R301 R302 R303 R304 R307 R310 R311 R312 R313 R314 R315 R316 R319 R320 R321 R400 R401 R402 R403 R404 R405 R406 R407 R408 R409 R410 R411 R412 R413 R414 R415 R416: library part "Res Semi", "Semiconductor Resistor", LatestRevisionDate=17-Jul-2002, LatestRevisionNote="Re-released for DXP Platform.", PackageReference=AXIAL-0.5, Published=8-Jun-2000, Publisher="Altium Limited"
RJ201: library part rj45
S101 S301 S302 S303 S304 S305 S306: library part SW-PB, "Switch", LatestRevisionDate=17-Jul-2002, LatestRevisionNote="Re-released for DXP Platform.", PackageReference=SPST-2, Published=24-Mar-1999, Publisher="Altium Limited"
SC301 U101 U201: library part ATMEGA163_DIP40, "Atmel Microcontroller - Library created by carel..  <www.mpfreezone.com>"
U301: "500mA, Very Low Drop (0.45V) Voltage Regulator", ComponentLink1Description="Manufacturer Link", ComponentLink1URL=http://www.st.com/, ComponentLink2Description=Datasheet, ComponentLink2URL=http://www.st.com/stonline/books/pdf/docs/2574.pdf, DatasheetVersion=Feb-2004, LatestRevisionDate=06-Jun-2005, LatestRevisionNote="PCB pads lengthened.", PackageDescription="D-PAK/TO-252-AA; 3 Leads (1 Cropped); Body 10.1 (inc. leads) x 6.6 mm (LxW max)", PackageReference=TO-252, PackageVersion=Jun-2004, Published=24-Aug-2001, Publisher="Altium Limited"
U400: library part AT24HC04BN-SP25-T, "4Kbit (512 x 8), 2-wire Bus Serial Automotive EEPROM with 1/2 memory Write Protect, 2.5V, 8-Pin SOIC, Tape & Reel", Code_IPC=SOIC127P600-8, Code_JEDEC=MS-012-AA, ComponentLink1Description="Manufacturer Link", ComponentLink1URL=http://www.atmel.com/products/serial/default.asp, ComponentLink2Description=Datasheet, ComponentLink2URL=http://www.atmel.com/dyn/resources/prod_documents/doc5192.pdf, ComponentLink3Description="Atmel.com Home", ComponentLink3URL=http://www.atmel.com, DatasheetVersion="5192C,  Jan-2009", PackageDescription="8-Lead (0.150\" Wide Body), Plastic Gull Wing Small Outline (JEDEC SOIC)", PackageReference=8S1, PackageVersion="revC, Mar-2005", Published=20-Sep-2010, Publisher="Altium Limited"
U401: library part AD642JH, "Precision, Low Cost Dual BiFET Operational Amplifier", Code_JEDEC=MO-006-AH, ComponentAvailability=Obsolete, ComponentLink1Description="Manufacturer Link", ComponentLink1URL=http://www.analog.com/, ComponentLink2Description=Datasheet, ComponentLink2URL=http://www.analog.com/UploadedFiles/Obsolete_Data_Sheets/765962AD642.pdf, DatasheetVersion="REV. 0", LatestRevisionDate=17-Jul-2002, LatestRevisionNote="Re-released for DXP Platform.", Note="Pin 4 connected to case.", PackageDescription="Can; 8 Leads; Pin Circle Dia. 5.84 mm; Lead Dia. 0.53 mm (max)", PackageReference=H-08B, PackageVersion=1990, Published=8-Jun-2000, Publisher="Altium Limited"
U402: "+2.5V Precision Voltage Reference", Code_IPC=SOIC127P600-8, Code_JEDEC=MS-012-AA, ComponentLink1Description="Manufacturer Link", ComponentLink1URL=http://www.analog.com/en/prod/0%2C2877%2CREF03%2C00.html, ComponentLink2Description=Datasheet, ComponentLink2URL=http://www.analog.com/UploadedFiles/Data_Sheets/56211209654177REF03_f.pdf, DatasheetVersion="REV. C 1992", LatestRevisionDate=13-Apr-2006, LatestRevisionNote="IPC-7351 Footprint Added.", Note="Pins 1, 7 and 8 are not connected", PackageDescription="8-Pin Small Outline Integrated Circuit 1.27 mm Pitch", PackageReference=SO-8, PackageVersion=revA, Published=8-Jun-2000, Publisher="Altium Limited"
U403: library part AT90LS2323-4SC, "8-Bit AVR Microcontroller with 2K Bytes of In-System Programmable Flash Memory", ComponentLink1Description="Manufacturer Link", ComponentLink1URL=http://www.atmel.com, ComponentLink2Description=Datasheet, ComponentLink2URL=http://www.atmel.com/dyn/resources/prod_documents/doc1004.pdf, DatasheetVersion=1004D-09/01, LatestRevisionDate=13-Apr-2006, LatestRevisionNote="IPC-7351 Footprint Added.", PackageDescription="8-Pin Small Outline Package 1.27 mm Pitch", PackageReference=8S2, PackageVersion="revB, May-2002", Published=17-Sep-2003, Publisher="Altium Limited"
U404: library part MAX3232CUE, "3.0V TO 5.5V, Low-Power, up to 1Mbps, True RS-232 Transceiver Using Four 0.1µF External Capacitor", ComponentLink1Description="Manufacturer Link", ComponentLink1URL=http://www.maxim-ic.com/, ComponentLink2Description=Datasheet, ComponentLink2URL=http://pdfserv.maxim-ic.com/en/ds/MAX3222-MAX3241.pdf, DatasheetVersion=Mar-1999, LatestRevisionDate=29-May-2009, LatestRevisionNote="IPC-7351 Footprint Added.", PackageDescription="16-Pin Thin Small Outline Package 0.65 mm Pitch", PackageReference=TSSOP16, PackageVersion="21-0066 C", Published=16-Jan-2001, Publisher="Altium Limited"
X201: library part XTAL, "Crystal Oscillator", LatestRevisionDate=17-Jul-2002, LatestRevisionNote="Re-released for DXP Platform.", PackageReference=R38, Published=8-Jun-2000, Publisher="Altium Limited"

## Free pads (board coordinates)
  round 5 hole 3.5: 1(4.5,-67.5) 1(4.5,-6.5) 1(15,-68.5) 1(15,-5.5) 1(77,-67.5) 1(77,-6.5) 1(122,-68.5) 1(122,-5.5) 1(132,-67.5) 1(132,-6.5) 1(142,-68.5) 1(142,-5.5) 1(187,-67.5) 1(187,-6.5) 1(249,-68.5) 1(249,-5.5) 1(259.5,-67.5) 1(259.5,-6.5)
  round 5 hole 3: 9(175.95,-7.05) 10(88.05,-7.05) 12(88.05,-72.05) 13(175.95,-72.05)
  round 1 smd: Fidu1(241,-4) Fidu2(252,-63) Fidu3(10,-64) Fidu4(8,-11)
  round 1 smd far side: Fidu4(8,-11) Fidu4(10,-64) Fidu4(241,-4) Fidu4(252,-63)

## Via types
v1: diameter 1, hole 0.5, Top Layer to Bottom Layer, tented both sides, 636 vias
v2: diameter 1, hole 0.5, Top Layer to Bottom Layer, 146 vias
v3: diameter 1.2, hole 0.7, Top Layer to Bottom Layer, tented top, 9 vias
v4: diameter 1.2, hole 0.7, Top Layer to Bottom Layer, 1 vias

## Nets (pads, with @x,y where several pads share a name; then routed paths per layer and width w, separated by ;. In a path a pad name is that pad's centre, name@x,y a point inside that pad or via, vN(x,y) a via of type N, cw(c..) or ccw(c..) an arc to the next point about the centre after c; other vN are vias at no path point)
GND: C100.1 C101.2 C102.2 C103.2 C104.1 C105.2 C106.2 C107.2 C108.1 C109.1 C110.1 C111.1 C112.1 C115.2 C201.2 C202.2 C203.2 C204.2 C205.2 C206.2 C207.1 C208.1 C209.1 C210.1 C211.1 C215.2 C216.2 C217.2 C220.2 C221.2 C300.2 C301.2 C302.1 C303.2 C304.1 C305.1 C306.2 C307.1 C308.2 C309.1 C310.2 C311.2 C312.1 C314.1 C315.1 C316.1 C317.1 C318.1 C319.1 C400.2 C401.2 C402.1 C403.1 C404.2 C405.2 C406.2 C407.2 C409.2 C411.2 C412.1 CN9.6 CN102.25 CN102.28 CN102.30 CN103.15 CN103.16 CN104.15 CN104.16 CN400.8 CN400.9 CN400.10 E104.2 E300.2 E301.2 E302.2 E303.2 E400.2 E401.2 E402.2 FT202.1 FT204.1 LED106.K LED108.K pad.1 pad.9 pad.10 pad.12 pad.13 R108.1 R202.2 R314.2 R316.2 R401.2 R408.2 R410.2 S101.2 S301.2 S302.2 S303.2 S304.2 S305.2 S306.2 SC301.0 SC301.3 SC301.6 U101.3 U101.13 U101.23 U101.33 U101.43 U101.53 U101.63 U101.73 U101.84 U101.93 U201.12 U201.15 U201.18 U201.19 U201.20 U201.21 U201.22 U201.27 U201.37 U201.47 U201.59 U201.64 U201.73 U201.84 U201.93 U201.97 U301.4 U400.1 U400.2 U400.3 U400.4 U400.7 U401.4 U402.4 U403.6 U403.9 U404.15 | length 61.8
  Top Layer w0.3: U301.4@46.3,-56.045 U301.4@46.3,-55.645 ; R108.1@85.48,-42.55 R108.1@85.48,-42.2 ; U101.84@97.92,-24.17 98.905,-24.17 v1(100.32,-25.585) ; U101.73@100.47,-18.62 100.47,-19.577 101.878,-20.985 v1(103.02,-20.985) ; v1@102.52,-31.75 102.61,-31.66 v1@102.721,-31.66 ; v1@102.666,-31.604 v1@102.721,-31.66 ; C409.2@104.839,-47.38 C409.2@105,-47.38 C409.2@105.04,-47.42 ; U101.13@105.47,-33.72 105.47,-32.32 104.81,-31.66 v1(102.87,-31.66) v1@102.721,-31.66 ; U101.63@105.47,-18.62 105.47,-19.67 106.62,-20.82 107.142,-20.82 107.612,-21.29 v1(107.82,-21.29) ; v1@108.25,-30.22 108.065,-30.22 v1(108.065,-30.333) 108.065,-30.445 109.5,-31.88 109.92,-31.88 110.47,-32.43 U101.23@110.47,-33.72 110.47,-34.677 111.043,-35.25 112.37,-35.25 ; U101.53@110.47,-18.62 110.47,-20.48 110.96,-20.97 v1(110.96,-22) ; v1@111.556,-24.385 111.556,-24.177 112.063,-23.67 U101.43@113.02,-23.67 ; 111.71,-29.05 111.71,-29.023 112.063,-28.67 U101.33@113.02,-28.67 117.61,-28.67 117.64,-28.7 ; U402.4@120.79,-21.69 121.301,-21.69 U402.4@121.44,-21.829 ; R316.2@122.77,-24.32 R316.2@122.77,-23.97 ; R410.2@141.94,-29.28 142.34,-29.68 R410.2@142.69,-29.68 ; R401.2@144.77,-18 R401.2@144.87,-18.1 ; U403.9@161.54,-25.21 U403.9@161.64,-25.11 ; U201.73@182.59,-46.71 183.95,-46.71 v1(184.8,-47.56) ; U201.64@182.59,-42.21 184.09,-42.21 v1(184.95,-43.07) ; U201.59@182.59,-39.71 183.66,-39.71 184.5,-40.55 v1(184.6,-40.55) ; U201.47@185.64,-34.16 185.64,-36.25 v1(185.79,-36.4) ; 190.64,-35.31 U201.37@190.64,-34.16 ; v1(194.31,-43.16) 194.64,-42.83 195.57,-42.83 196.19,-42.21 U201.12@197.69,-42.21 198.647,-42.21 199,-41.857 199,-40.979 198.731,-40.71 U201.15@197.69,-40.71 196.733,-40.71 196.14,-40.117 196.14,-39.066 195.954,-38.88 195.954,-38.264 v1(195.82,-38.13) ; FT202.1@205.13,-8.2 FT202.1@205.13,-8.15 ; v1@207.866,-6.134 v1(208,-6)
  Bottom Layer w0.3: C203.2@179.36,-39.24 C203.2@179.36,-38.974
  other v1: 116,-74.39 124,-74.39 132,-74.39 140,-74.39 148,-74.39 156,-74.39 64.005,-74.12 68.009,-74.12 16,-74 24,-74 28,-74 32,-74 36,-74 40,-74 44,-74 48,-74 52,-74 56,-74 60,-74 72,-74 76,-74 80,-74 84,-74 92,-74 164,-74 172,-74 180,-74 240,-74 248,-74 256,-74 260,-74 9.29,-73.17 19.73,-73.1 239.54,-71.83 2.89,-71.67 116.71,-70.72 125.48,-70.38 191.247,-70.158 157.36,-70.01 20,-70 84,-70 208,-70 146.82,-69.98 213.021,-69.935 74.34,-69.57 69.01,-69.33 204.4,-69.34 166.94,-69.11 33.25,-69.02 148.45,-68.94 155.29,-68.87 145.49,-68.84 151.44,-68.84 63.44,-68.78 58.59,-68.7 158.87,-68.56 135.807,-68.316 197.054,-68.037 209.5,-67.98 214.47,-67.87 153.49,-67.67 148.089,-67.422 193.15,-67.14 219.94,-66.98 200.1,-66.74 93.62,-66.56 60.82,-66.31 194.54,-66.05 72.99,-65.99 244.01,-65.75 99.57,-65.69 51.75,-65.68 81.98,-65.68 136.92,-65.64 54.45,-65.52 26.93,-65.41 238.481,-65.357 116.04,-65.24 225.58,-65.13 19.95,-64.98 68.29,-64.8 162.49,-64.65 49.48,-64.48 174.92,-64.42 22.18,-64.37 166.89,-64.39 209.73,-64.3 171.54,-64.16 169.98,-63.78 67.2,-63.68 70.29,-63.66 189.085,-63.486 176.15,-63.29 55.1,-63.22 217.21,-63.18 112.52,-63.16 116.31,-63.15 224.95,-63.02 220.85,-62.89 135.46,-62.85 133.86,-62.83 132.5,-62.81 129.08,-62.71 140.25,-62.59 53.89,-62.41 57.71,-62.33 165.86,-62.21 236.2,-62.02 244,-62 260,-62 19.585,-61.897 49.78,-61.43 169.52,-61.43 2.08,-61.27 233.49,-60.51 14.53,-60.48 36.29,-60.25 32.11,-60.11 59.86,-59.84 159.75,-59.67 65.87,-59 72.17,-58.94 129.72,-58.78 119.37,-58.67 22.24,-58.5 70.59,-58.52 28.36,-58.39 4,-58 8,-58 240,-58 248,-58 252,-58 256,-58 260,-58 50.6,-57.97 173.28,-57.81 244.098,-57.804 101.39,-57.68 109.36,-57.64 190.5,-57.56 96.58,-57.48 219.66,-57.38 187.85,-57.35 14.28,-57.27 162.25,-57.21 236.01,-57.21 231.88,-57.15 227.8,-57.04 224.19,-56.98 79.51,-56.84 155.57,-56.46 57.37,-56.4 163.59,-56.22 211.39,-56.16 97.25,-56.12 205.007,-56.022 111.34,-55.99 190.83,-55.83 208.91,-55.7 203.13,-55.25 175.02,-55.23 107.17,-54.93 98.469,-54.905 18.78,-54.8 220.78,-54.75 94.04,-54.61 109.28,-54.12 4,-54 8,-54 85.66,-53.99 212,-54 224,-54 232,-54 236,-54 240,-54 244,-54 248,-54 252,-54 256,-54 260,-54 228.086,-53.939 75.49,-53.57 27.98,-53.51 77.76,-53.42 196.62,-53.42 165.7,-53.41 14.22,-53.32 192.38,-53.32 92.12,-53.08 139.71,-53.03 152.49,-52.97 141.73,-52.74 215.19,-52.71 155.11,-52.68 174.62,-52.61 22.09,-52.6 129.48,-52.45 94.14,-52.12 96.66,-52.04 173.02,-51.97 187.77,-51.63 76.82,-51.38 198.81,-50.68 46.27,-50.34 179.75,-50.3 74.83,-50.28 163.61,-50.23 7.698,-50.191 161.9,-50.12 14.34,-50.11 4,-50 212,-50 216,-50 129.621,-49.979 103.84,-49.96 110.9,-49.96 126.82,-49.96 131.13,-49.96 32.67,-49.56 198.63,-49.45 153.3,-48.73 179.42,-48.67 149.82,-48.55 177.77,-48.48 219.41,-48.48 74.83,-48.36 78.45,-48.17 61.52,-48.11 40.93,-47.95 136.91,-47.82 194.33,-47.32 191.08,-46.83 189.01,-46.78 186.1,-46.72 79.52,-46.59 178.05,-46.5 14.59,-46.35 104.12,-46.24 4,-46 8,-46 212,-46 216,-46 220,-46 228,-46 232,-46 236,-46 240,-46 244,-46 248,-46 252,-46 256,-46 260,-46 92.87,-45.96 154.96,-45.95 102.72,-45.92 153.44,-45.9 161.23,-45.88 125.61,-45.47 122.25,-45.34 165.01,-45.27 194.48,-45.26 222.95,-45.26 119.47,-45.16 23.35,-45.07 19.15,-44.87 84.125,-44.753 58.73,-44.68 81.55,-44.61 184.47,-44.59 139.67,-44.5 174.541,-44.452 39.58,-43.94 74.97,-43.91 175.66,-43.84 64.79,-43.72 148.09,-43.54 27.79,-43.39 162.95,-43.37 69.81,-43.32 188.75,-43.28 191.48,-43.19 164.61,-43.11 78.68,-43.06 142.163,-42.663 83.29,-42.65 236,-42.63 244.06,-42.63 251.9,-42.6 92.22,-42.58 248.04,-42.58 96.09,-42.55 232,-42.54 255.99,-42.51 14.77,-42.46 124.5,-42.4 94.19,-42.2 4,-42 8,-42 216,-42 220,-42 260,-42 189.79,-41.85 76.84,-41.22 41,-41.16 47.41,-40.92 188.22,-40.64 191.15,-40.58 194.34,-40.47 189.75,-40.2 64.95,-40.06 32.3,-39.07 85.26,-39.02 201.93,-38.73 93.61,-38.64 194.45,-38.38 86.13,-38.15 22.36,-38.08 4,-38 8,-38 220,-38 228,-38 236,-38 244,-38 248,-38 252,-38 256,-38 260,-38 35.57,-37.96 184.62,-37.95 156.92,-37.89 199.41,-37.82 153.15,-37.71 150.13,-37.39 188.71,-37.23 240.2,-37.23 151.66,-37.11 202.53,-36.97 59,-36.83 55.12,-36.159 43.51,-36.06 190.05,-36.05 113.29,-36.01 115.41,-36.01 148.76,-35.98 192.3,-35.96 194.09,-35.95 84.11,-35.93 169.16,-35.57 171.55,-35.48 156.78,-35.29 164.17,-34.664 126.41,-34.53 124.227,-34.43 4,-34 8,-34 224,-34 228,-34 236,-34 240,-34 244,-34 248,-34 252,-34 255.694,-34 260,-34 155.54,-33.86 31.8,-33.58 172.15,-33.4 181.714,-33.344 49.27,-33.22 36.55,-33.14 163.2,-32.69 20.23,-32.48 43,-32.28 100.19,-31.66 109.47,-31.67 62.69,-31.37 182.12,-31.12 81.94,-30.91 120.83,-30.71 74.1,-30.67 124.05,-30.64 76.35,-30.61 85.61,-30.6 103.06,-30.52 83.69,-30.48 32.3,-30.31 119.76,-30.16 4,-30 8,-30 224,-30 228,-30 236,-30 240,-30 244,-30 248,-30 252,-30 256,-30 260,-30 180.57,-29.97 110.991,-29.639 59.24,-29.61 42.38,-29.48 55.15,-29.49 100.21,-29.49 67.93,-29.37 12.79,-29.04 194.93,-29.04 44,-29 76.73,-28.84 169.4,-28.45 104.86,-28.12 70.02,-28.08 103.63,-28.08 225.37,-27.99 110.922,-26.53 168.2,-26.54 107.86,-26.46 120.51,-26.45 192.65,-26.45 106.34,-26.43 71.45,-26.16 4,-26 8,-26 252,-26 260,-26 255.816,-25.963 212.84,-25.86 163.59,-25.71 60.28,-25.54 165.51,-25.48 66.71,-25.28 56.42,-25.17 92.01,-25.08 103.07,-24.95 153,-24.9 16.191,-24.814 23.16,-24.81 147.84,-24.73 104.38,-24.67 111.29,-24.16 107.87,-24.02 43,-24 186.84,-23.87 145.28,-23.74 114.6,-23.68 74.34,-23.67 165.14,-23.63 36,-23.58 58.73,-23.57 151.04,-23.56 142.96,-23.42 88.34,-23.35 206.75,-23.32 29.21,-23.21 249.5,-22.8 199.473,-22.619 99.97,-22.56 85.69,-22.55 194.81,-22.06 74.63,-22.04 18.12,-22.01 4,-22 8,-22 50,-22 77.87,-22 252,-22 256,-22 260,-22 88.92,-21.9 122.59,-21.89 106.69,-21.62 208.318,-21.644 20.94,-21.42 66.28,-21.17 101.66,-20.69 118.6,-20.66 153.65,-20.62 14.47,-20.58 74.83,-20.52 87.39,-20.49 68.11,-20.27 73.39,-20.17 83.56,-20.01 78.03,-19.77 85.81,-19.76 147.35,-19.76 144.91,-19.72 69.17,-19.68 62.6,-19.54 61.34,-19.45 42.15,-19.39 153.15,-18.64 16.65,-18.51 28.78,-18.15 180.3,-18.07 256.122,-18.049 4,-18 8,-18 12,-18 59,-18 252,-18 260,-18 35.75,-17.78 21.99,-17.72 186.56,-17.56 199.61,-17.36 144.1,-16.77 142.12,-16.74 121.8,-16.7 132.68,-16.71 19.3,-15.93 60.18,-15.79 53.29,-14.72 56.81,-14.19 13.45,-14.04 16,-14 184,-14 188,-14 192,-14 200,-14 252,-14 256,-14 260,-14 28.762,-13.508 22.59,-13.45 35.852,-13.39 55.72,-12.71 2,-12.47 68.17,-12.07 70.54,-11.69 177.12,-11.51 260.11,-10.319 16,-10 20,-10 184,-10 200,-10 252,-10 256,-10 192.073,-9.889 81.1,-9.08 195.64,-9.07 215.39,-9.07 126.09,-8.69 140.05,-8.69 66.64,-8.05 200.52,-7.75 61.14,-7.6 40.91,-6.93 45.22,-6.63 52.9,-6.36 51.163,-6.331 180.22,-6.18 56.66,-6.13 147.03,-6.12 20,-6 184,-6 192,-6 196,-6 200,-6 212,-6 215.73,-6 252,-6 256,-6 170.47,-5.94 219.41,-5.92 93.2,-5.56 81.1,-5.32 73.51,-5.19 28.82,-5.07 32.73,-4.76 147.251,-4.276 136.53,-4.22 126.15,-3.83 98.26,-3.77 160.48,-3.72 153.17,-3.66 117.883,-3.55 193.66,-3.54 183.46,-2.88 172.66,-2.73 177.3,-2.6 205.32,-2.42 56.08,-2.3 191.889,-2.098 252.012,-2.098 166.88,-2.07 4,-2 8,-2 12,-2 16,-2 188,-2 200,-2 208,-2 212,-2 220,-2 224,-2 228,-2 232,-2 236,-2 248,-2 256,-2 260,-2 215.84,-1.9 44.63,-1.77 80.98,-1.74 93.38,-1.74 64.87,-1.61 73.45,-1.61 96.96,-1.552 101.28,-1.55